# EAGLE board STM32L441CE_4L-connector_05mm_pitch (EAGLE 9.6.2)
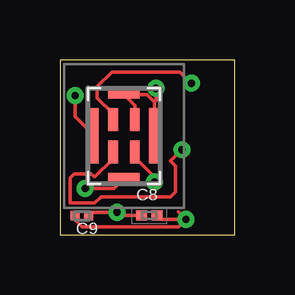
[diagram p0: board, top side]
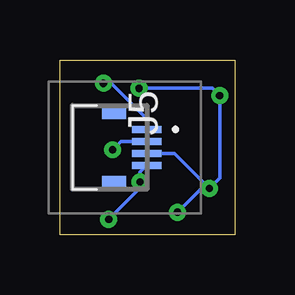
[diagram p1: board, bottom side, seen from below]

Size 7.3 x 7.3 mm. Coordinates in mm from the lower left corner, seen from the top.
Outline: 0,0 7.3,0 7.3,2.43 7.3,2.83 7.3,7.3 0,7.3 0,0
Copper layers ([2:[15:1+2*15+16]]): Top 0.035mm / dielectric 1.5mm / GND 0.035mm / dielectric 0.15mm / VDD 0.035mm / dielectric 0.2mm / Bottom 0.035mm
Design rules "default *": minimum track width 6mil, minimum drill 0.3mm, track to track 6mil, track to pad 6mil, pad to pad 6mil, via to via 6mil, smd to smd 6mil, copper to edge 10mil, drill to drill 0.3mm, minimum pad ring 10mil, minimum via ring 8mil, stop-mask expansion 4mil, vias tented up to drill 0mil, thermal gap 10mil

## Footprints (pad centres in the part's own frame; a part is rotated, then mirrored left to right if it is on the bottom)
CAPC0603X33N = smd 0.46 x 0.42: 1 -0.33,0; 2 0.33,0
CAPC0603X33N' = smd 0.38 x 0.4: 1 -0.281,0; 2 0.281,0
5014610491 = smd 0.3 x 1.21: 1 -0.75,0.925; 2 -0.25,0.925; 3 0.25,0.925; 4 0.75,0.925 | smd 0.52 x 1: MP1 -1.45,-0.43; MP2 1.45,-0.43
MP34DT05TRA = smd 0.4 x 0.95: 1 -0.45,0.675; 2 -0.45,-0.675; 3 0.45,-0.675; 4 0.45,0.675 | smd 0.35 x 2.3: 5 -1.225,0; 6 1.225,0 | smd 1.3 x 0.35: 7 0,1.725; 8 0,-1.725

## Placement (x,y rotation side)
C8  AMK063AC6105KP-F  [CAPC0603X33N]  3.73,0.81 0 top
C9  GRM033C80J104KE15D  [CAPC0603X33N']  0.92,0.8 180 top
J5  501461-0491  [5014610491]  4.6,3.65 270 bottom
MK1  MP34DT05TR-A  [MP34DT05TRA]  2.67,4.13 0 top

## Library data of the parts
C8 = AMK063AC6105KP-F; DESCRIPTION: Multilayer Ceramic Capacitors MLCC - SMD/SMT 0201 4VDC 1uF 10% X6S; HEIGHT: 0.33mm; MANUFACTURER_NAME: TAIYO YUDEN; MANUFACTURER_PART_NUMBER: AMK063AC6105KP-F; MOUSER_PART_NUMBER: 963-AMK063AC6105KP-F; MOUSER_PRICE-STOCK: https://www.mouser.com/Search/Refine.aspx?Keyword=963-AMK063AC6105KP-F
C9 = GRM033C80J104KE15D; DESCRIPTION: SMD Capacitor X6S(EIA) with Capacitance: 0.10uF Tol. 10%. Rated Voltage: 6.3Vdc; DIGI-KEY_PART_NUMBER: 490-10390-1-ND; DIGIKEY-PURCHASE-URL: https://snapeda.com/shop?store=DigiKey&id=1836969; MF: Murata Electronics; MP: GRM033C80J104KE15D; PACKAGE: 0603 Taiyo Yuden
J5 = 501461-0491; DESCRIPTION: MOLEX - 501461-0491 - CONNECTOR, FPC, 4POS, 1ROW, 0.5MM; HEIGHT: 3.45mm; MANUFACTURER_NAME: Molex; MANUFACTURER_PART_NUMBER: 501461-0491; MOUSER_PART_NUMBER: 538-501461-0491; MOUSER_PRICE-STOCK: https://www.mouser.co.uk/ProductDetail/Molex/501461-0491?qs=un1JgU%2F7%252BkQooiwKJB4FIA%3D%3D
MK1 = MP34DT05TR-A; DESCRIPTION: STMICROELECTRONICS - MP34DT05TR-A - MEMS MICROPHONE, 3.6V, HCLGA-4; HEIGHT: 1mm; MANUFACTURER_NAME: STMicroelectronics; MANUFACTURER_PART_NUMBER: MP34DT05TR-A; MOUSER_PART_NUMBER: 511-MP34DT05TR-A; MOUSER_PRICE-STOCK: https://www.mouser.com/Search/Refine.aspx?Keyword=511-MP34DT05TR-A

## Nets
DFSDM_CLK: J5.1 MK1.1
DFSDM_DAT: J5.2 MK1.2
GND: C8.1 C9.1 J5.3 MK1.4 MK1.5 MK1.6 MK1.7 MK1.8
VDD: C8.2 C9.2 J5.4 MK1.3

## Tracks (layer width: path | path; a pad name or v marks a point on that pad's centre or on a via)
DFSDM_CLK  (via drill 0.3)
  Top 0.152: MK1.1 2.22,5.05 1.56,5.71 1.56,6.18 2.18,6.8 5.01,6.8 v5.48,6.32 5.49,6.31
  Bottom 0.152: v5.48,6.32 5.17,6.32 3.67,4.83 J5.1
DFSDM_DAT  (via drill 0.3)
  Top 0.152: MK1.2 2.22,3.17 1.47,2.43 1.43,2.43 1.31,2.54 0.59,2.54 0.43,2.38 0.43,1.32 1.45,1.32 1.71,1.58 4.61,1.58 4.82,1.79 4.82,2.87 4.61,3.08 5.08,3.55 v5.1,3.55
  Bottom 0.152: J5.2 4.75,3.9 v5.1,3.55
GND  (via drill 0.3)
  Top 0.152: 3.94,5.17 3.9,5.21 MK1.6 3.95,4.18 3.95,5.54 | 3.95,5.54 3.64,5.86 MK1.7 3.13,5.39 3.13,4.82 MK1.4 | 3.95,5.54 4,5.6 v4,6.12 | v0.63,5.81 0.63,4.94 MK1.5 | MK1.8 2.67,2.35 2.26,1.94 v1.06,1.94 | C9.1 1.34,0.94 v2.39,0.94 2.52,0.81 C8.1
  Bottom 0.152: v4,6.12 0.94,6.12 v0.63,5.81 0.63,2.37 v1.06,1.94 | v2.39,0.94 1.4,1.94 v1.06,1.94 | J5.3 2.52,3.4 v1.06,1.94
VDD  (via drill 0.3)
  Top 0.152: MK1.3 3.12,3.26 3.95,2.42 v3.95,2.21 | 4.94,0.96 v5.26,0.64 | C9.2 0.64,0.63 0.94,0.33 4.95,0.33 v5.26,0.64 | v5.26,0.64 4.23,0.64 C8.2
  Bottom 0.152: v5.26,0.64 3.95,1.95 v3.95,2.21 3.95,2.62 J5.4